# Altium PCB LK-RX.PCBDOC
Units mm, origin at the board's own origin, x right, y up, seen from the top; angles counter-clockwise.
Board outline 26.25 x 26.26 mm, 4 copper layers (Top Layer, MidLayer1, MidLayer2, Bottom Layer); 71 components, 48 nets, 217 pads, 65 vias.
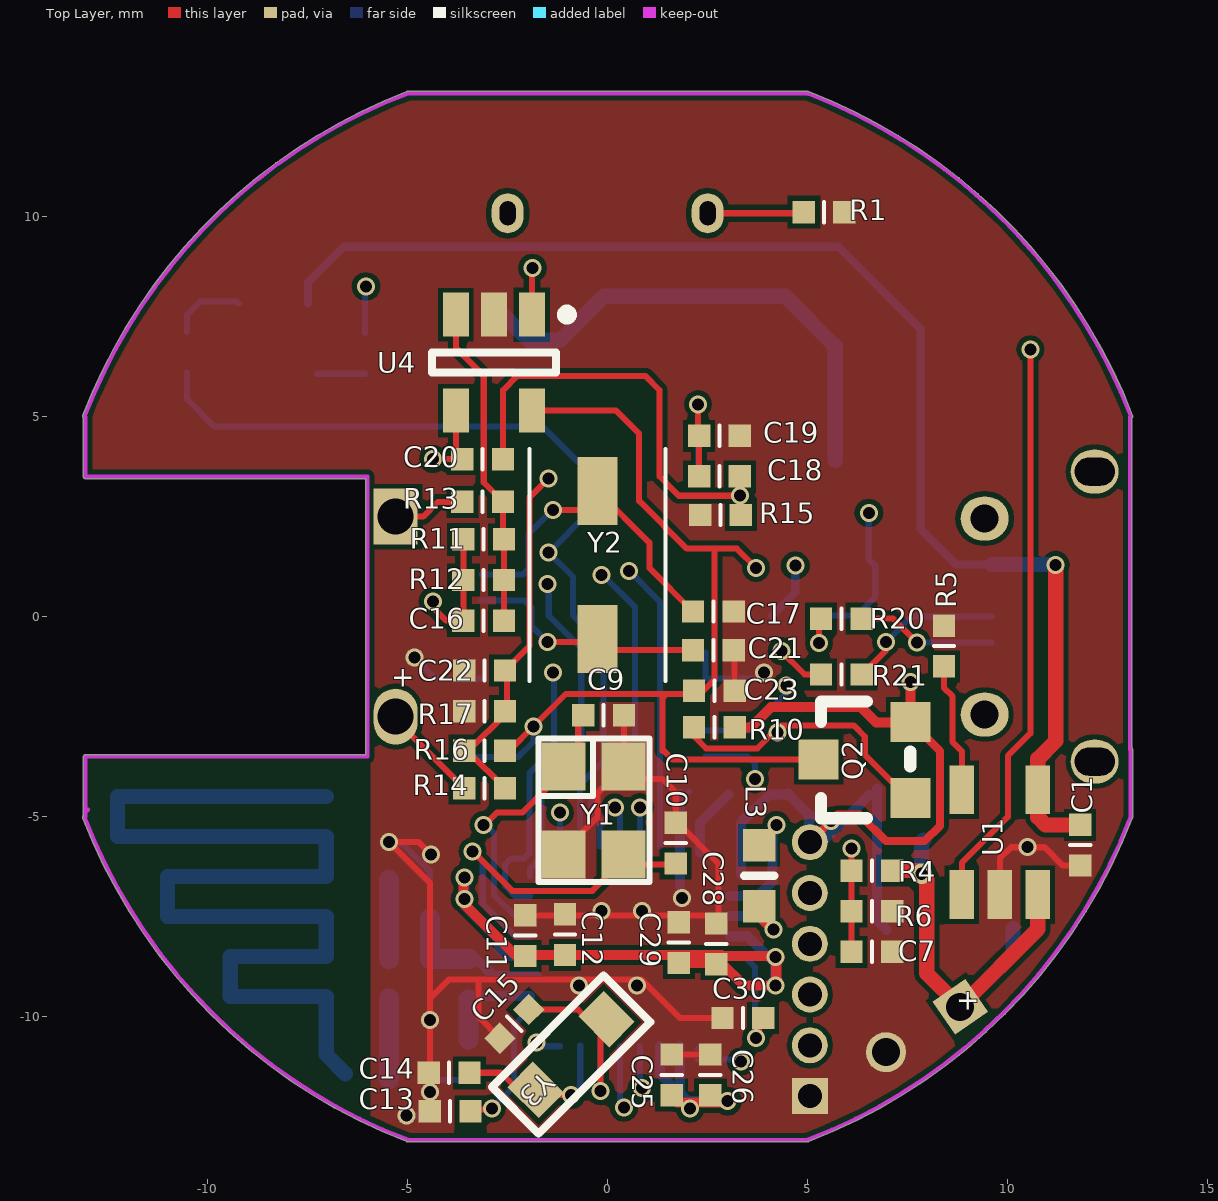
[diagram p0: Top Layer view]
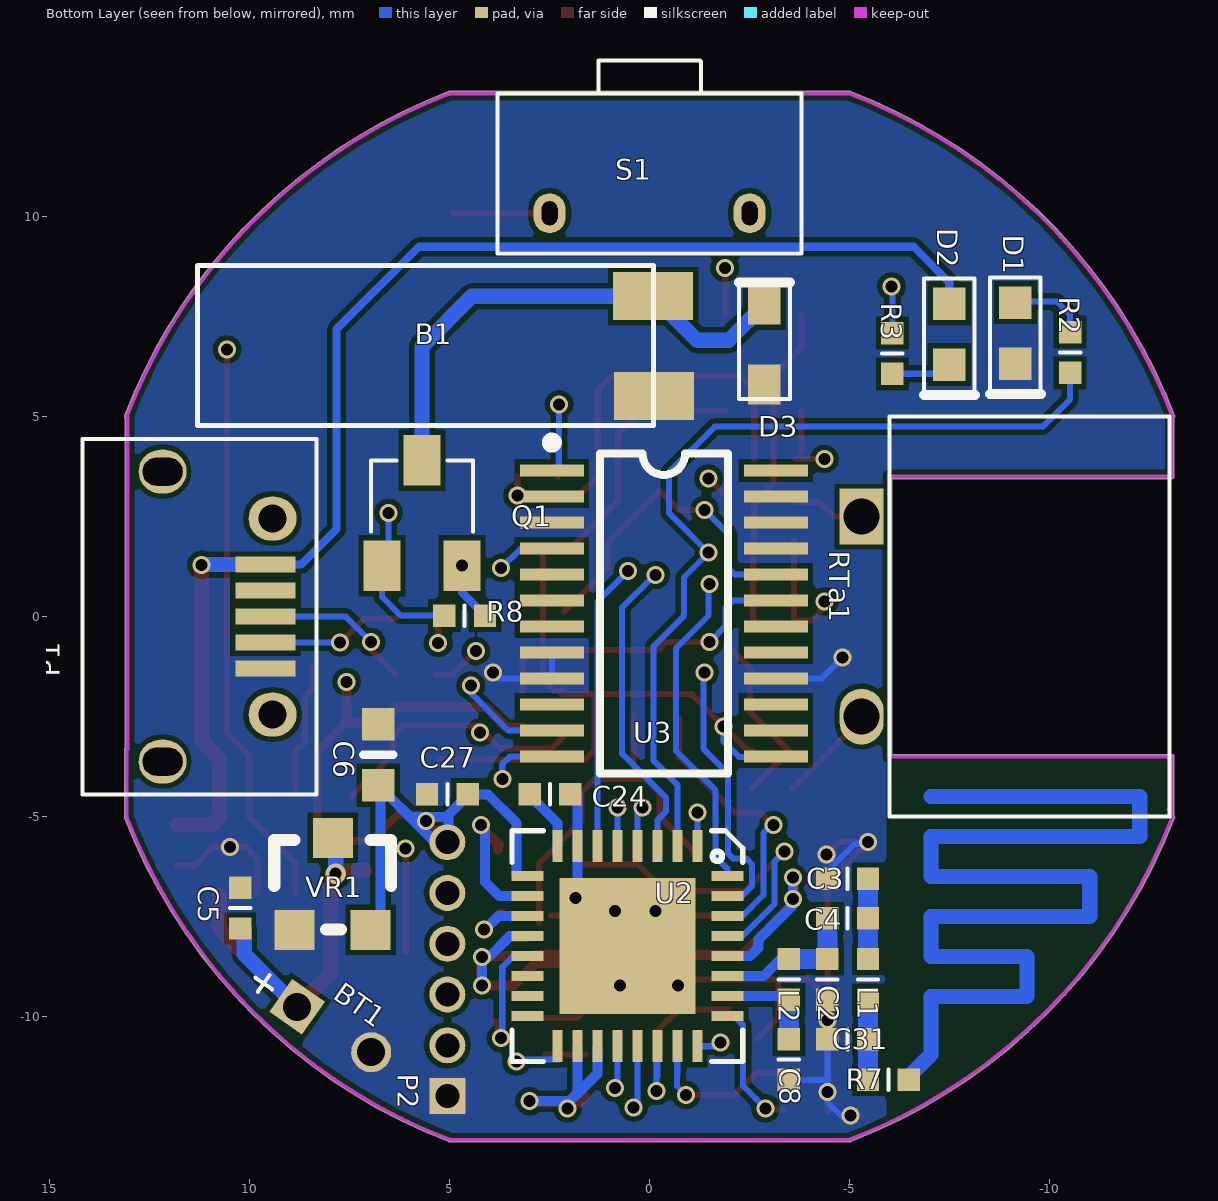
[diagram p1: Bottom Layer view, seen from below]
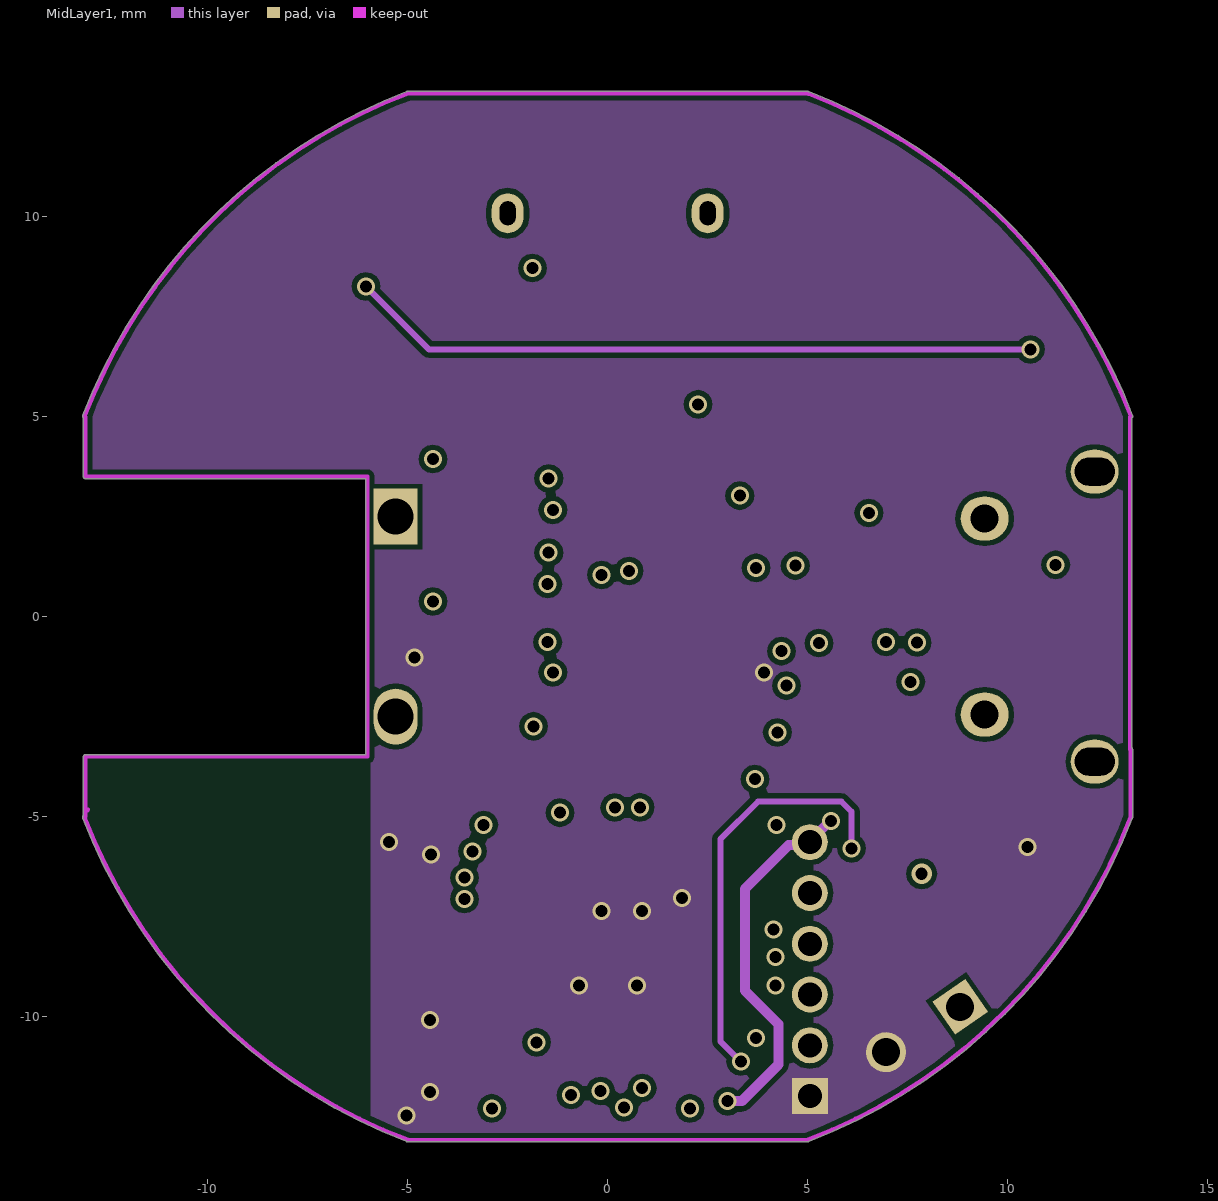
[diagram p2: MidLayer1]
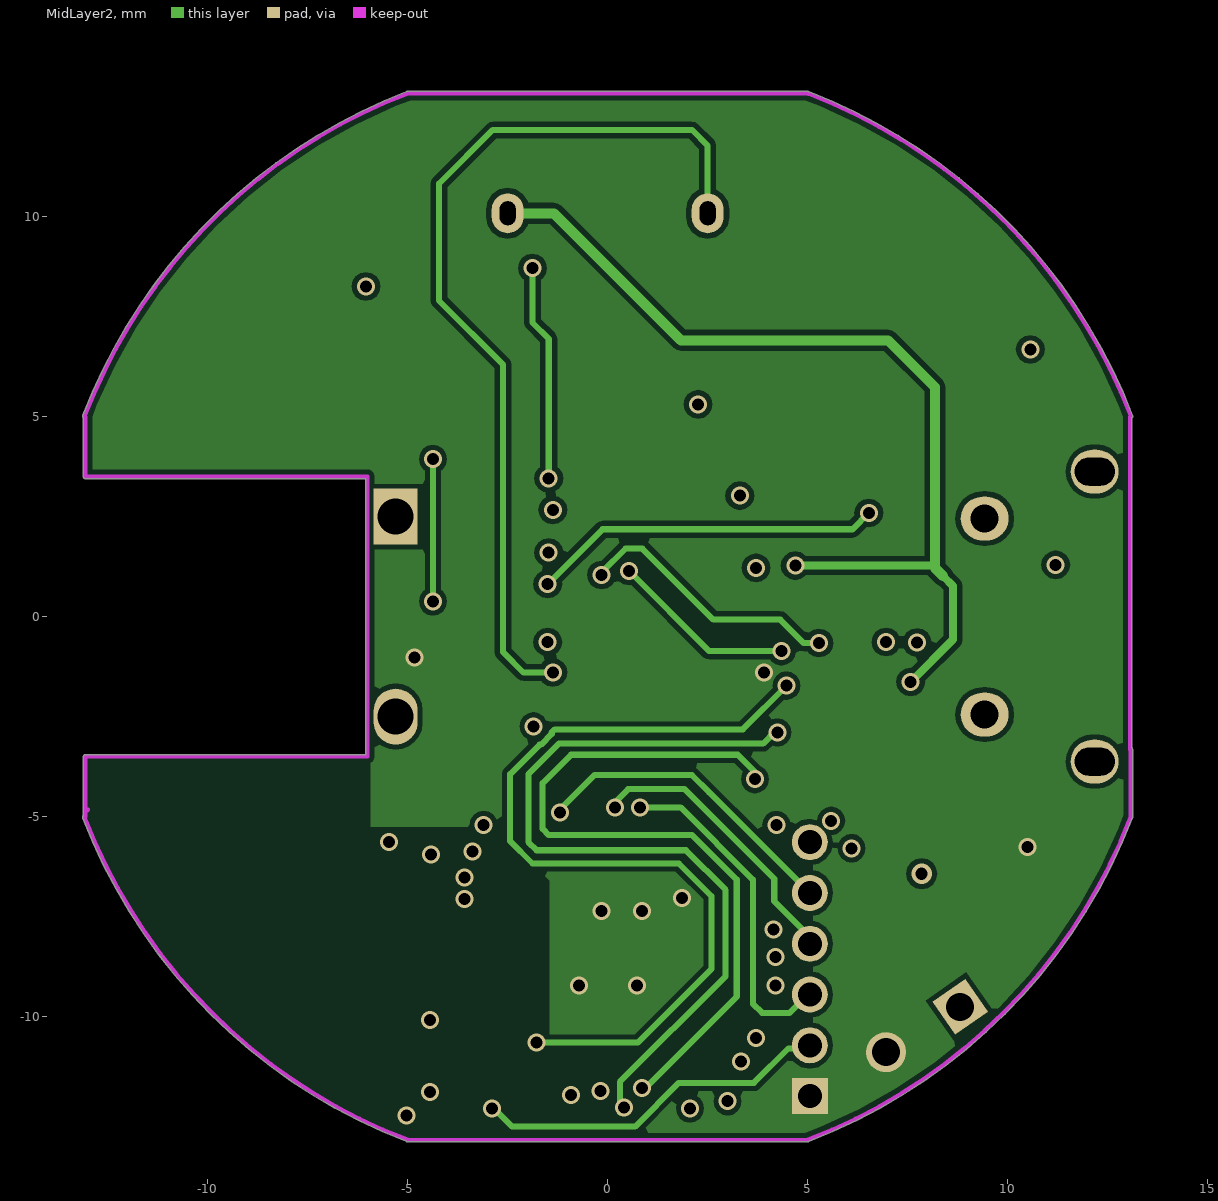
[diagram p3: MidLayer2]

## Layer stack, top to bottom
Top Solder: solder mask 0.0102, Solder Resist, Dk 3.5
Top Layer: signal copper 0.0356
Dielectric1: prepreg 0.32, FR-4, Dk 4.8
MidLayer1: signal copper 0.0356
Dielectric2: core 0.32, FR-4, Dk 4.8
MidLayer2: signal copper 0.0356
Dielectric3: prepreg 0.32, FR-4, Dk 4.8
Bottom Layer: signal copper 0.0356
Bottom Solder: solder mask 0.0102, Solder Resist, Dk 3.5

## Board outline
-13.118,-5.033 cw(c-13.071,-5.015) -13.119,-5.031 cw(c-13.073,-5.01) -13.108,-4.975 -13.106,-4.972 -13.106,-3.5 cw(c-13.056,-3.5) -13.056,-3.45 -6.05,-3.45 -6.05,3.45 -13.056,3.45 cw(c-13.056,3.5) -13.106,3.5 -13.106,4.968 cw(c-13.074,5.007) -13.121,5.025 cw(c0,0) -5.035,13.117 cw(c-5,13.081) -5,13.131 5,13.131 cw(c5,13.081) 5.035,13.117 cw(c0,0) 13.121,5.025 cw(c13.074,5.007) 13.124,5.007 cw(c13.074,5.007) 13.106,4.968 13.106,-3.281 cw(c13.071,-3.317) 13.121,-3.317 13.121,-5.015 cw(c13.071,-5.015) 13.118,-5.033 cw(c0,0) 5.033,-13.118 cw(c5,-13.08) 5,-13.13 -5,-13.13 cw(c-5,-13.08) -5.033,-13.118 cw(c0,0)

## Design rules (kind name [scope] priority, off if disabled: settings)
Clearance Clearance_1 [InNetClass('RF')] p1: gap=0.381
Clearance [All] p2: gap=0.127
ComponentClearance [All] p1: gap=0.127 collisioncheckmode=3 verticalgap=0.127 showdistances=FALSE
FabricationTestpoint [(IsPad And (OnTopLayer Or OnBottomLayer))] p1: side=3 testpointundercomponent=TRUE minsize=1.016 maxsize=2.54 preferedsize=1.524 minholesize=0 maxholesize=1.016 preferedholesize=0.813 testpointgrid=0.025 allowsidetop=TRUE allowsidebottom=TRUE usegrid=TRUE gridtolerance=0
PolygonConnect [All] p1: connectstyle=Direct reliefconductorwidth=0.254 reliefentries=4 polygonreliefangle="90 Angle" airgapwidth=0.254
RoutingCorners [All] p1: cornerstyle=Round minsetback=2.54 maxsetback=2.54
RoutingVias [All] p1: holewidth=0.305 width=0.508 viastyle="Through Hole" minholewidth=0.3 minwidth=0.45 maxholewidth=0.711 maxwidth=1.27
SolderMaskExpansion [All] p1: expansion=0.102
Width [All] p1: maxlimit=1 minlimit=0.152 preferedwidth=0.5
27 further rules are at their usual default settings.

## Components (designator, comment, footprint, x,y, rotation, side; value= is the part's Value field where it differs from the comment)
B1 "Motor" "MOTO-40*44*114 - 3D" -0.102,6.782 r90 bottom
BT1 "Battery" BT 8.814,-9.754 r215 bottom
C1 "1uF" 0402 11.811,-6.223 r90 top
C2 "1.2pF/10V" 0402 -4.445,-8.56 r270 bottom
C3 "1.8pF/10V" 0402 -4.445,-6.553 r180 bottom
C4 "220pF/10V" 0402 -5.461,-7.544 r0 bottom
C5 "1uF" 0402 10.236,-7.798 r90 bottom
C6 "22uF" 0603 6.782,-4.216 r90 bottom
C7 "100nF" 0402 7.112,-8.382 r180 top
C8 "18pF/10V" 0402 -3.48,-11.582 r90 bottom
C9 "12pF" 0402 -0.61,-2.464 r0 top
C10 "12pF" 0402 1.702,-6.172 r90 top
C11 "0.1uF/10V" 0402 -2.057,-7.468 r270 top
C12 "2.2uF/10V" 0402 -1.067,-7.442 r270 top
C13 "1uF/10V" 0402 -4.445,-12.37 r0 top
C14 "6pF" 0402 -4.47,-11.405 r0 top
C15 "6pF" 0402 -2.692,-10.541 r45 top
C16 "100pF" 0402 -3.607,-0.102 r0 top
C17 "15pF" 0402 2.134,0.127 r0 top
C18 "1nF" 0402 3.302,3.505 r180 top
C19 "10nF" 0402 2.286,4.521 r0 top
C20 "10nF" 0402 -3.632,3.937 r0 top
C21 "15pF" 0402 2.134,-0.838 r0 top
C22 "100pF" 0402 -3.581,-1.346 r0 top
C23 "0.1uF" 0402 3.175,-1.854 r180 top
C24 "1uF/10V" 0402 1.981,-4.445 r0 bottom
C25 "0.1uF/10V" 0402 1.6,-10.947 r270 top
C26 "1uF/10V" 0402 2.565,-10.947 r270 top
C27 "1uF/10V" 0402 5.563,-4.445 r180 bottom
C28 "1uF/10V" 0402 2.718,-7.671 r270 top
C29 "0.1uF/10V" 0402 1.778,-7.645 r270 top
C30 "1uF/10V" 0402 2.87,-10.033 r0 top
C31 "1.8pF/10V" 0402 -4.445,-10.566 r180 bottom
D1 "LEDG" LED0603#1 -9.144,7.087 r270 bottom
D2 "LEDR" LED0603#1 -7.493,7.061 r270 bottom
D3 "IN4148" LED0603#2 -2.87,6.833 r90 bottom
L1 "1.8nH" 0402 -5.461,-9.576 r90 bottom
L2 "1.3nH" 0402 -3.48,-9.576 r90 bottom
L3 "47uH" 0603 3.785,-5.715 r270 top
P1 "microUSB" MICROUSB 9.6,0 r90 bottom
P2 "Header 6" SIP6-1.27 5.055,-11.989 r90 bottom
Q1 "AO3401A" AO3401 5.69,2.591 r180 bottom
Q2 "AO3401A" SOT23 6.426,-3.581 r90 top
R1 "10K" 0402 5.918,10.109 r180 top
R2 "1K" 0402 -10.516,6.096 r90 bottom
R3 "1K" 0402 -6.071,7.087 r270 bottom
R4 "2M" 0402 6.096,-6.35 r0 top
R5 "2K" 0402 8.407,-0.229 r270 top
R6 "200K" 0402 7.112,-7.366 r180 top
R7 "0" 0402 -6.477,-11.582 r0 bottom
R8 "10K" 0402 5.131,0.025 r180 bottom
R10 "10K" 0402 2.159,-2.769 r0 top
R11 "43K" 0402 -2.591,1.93 r180 top
R12 "43K" 0402 -2.591,0.914 r180 top
R13 "43K" 0402 -3.632,2.87 r0 top
R14 "43K" 0402 -3.581,-4.293 r0 top
R15 "2.7MR" 0402 2.311,2.54 r0 top
R16 "43K" 0402 -3.581,-3.353 r0 top
R17 "43K" 0402 -3.581,-2.362 r0 top
R20 "0R" 0402 5.334,-0.051 r0 top
R21 "0R" 0402 5.334,-1.448 r0 top
RTa1 "RX-40K" US-10MM -5,0 r180 bottom
S1 "开关" SW3x6x5 0,10.084 r0 bottom
U1 "TP4054" TP4054 9.804,-5.639 r0 top
U2 "TLSR8258F512ET32" QFN-32 -1.194,-5.74 r270 bottom
U3 "CS102" TSSOP24 -0.356,0.076 r90 bottom
U4 "LMV321" MF05A_N -2.845,6.35 r90 top
VR1 "MCP33" SOT23 7.925,-6.68 r180 bottom
Y1 "24M" XTAL4TN_3225 -0.356,-4.851 r270 top
Y2 "8M" 5032 -0.254,1.295 r270 top
Y3 "32.768K" S3215 -0.914,-10.947 r225 top

## Footprints (in the part's own frame and the unit in brackets; to place one, negate y for a bottom-side part, rotate by r counter-clockwise, add the part's x,y. Pads: shape width x height; smd on the part's side, far side on the other; paste and mask are expansions set on the pad)
0402 [mil]
  rect 22x22 smd: 1(0,0) 2(40,0)
  silkscreen extent 20,-10 20,10
0603 [mil]
  rect 32x32 smd: 1(0,0) 2(60,0)
  silkscreen extent 30,-15 30,15
5032 [mm]
  rect 1.7x1 smd: 1(-1.85,0) 2(1.85,0)
  silkscreen extent -2.9,-1.7 2.9,1.7
AO3401 [mm]
  rect 0.915x1.27 smd: 1(-1,-1.318) 2(1,-1.318) 3(0,1.318)
  silkscreen extent -1.27,-0.46 1.27,1.32
BT [mm]
  rect 1x1 hole 0.7: 1(0,0)
  round 1 hole 0.7: 2(2.172,0.133)
  silkscreen extent -1.27,-0.25 -0.76,0.25
LED0603#1 [mil]
  rect 32x32 smd: 1(-30,0) 2(30,0)
  silkscreen extent -55,-25 60,25
LED0603#2 [mil]
  rect 39.37x32 smd: 1(-40.65,0) 2(38.09,0)
  silkscreen extent -55,-25 60,25
MF05A_N [mm] "SOT23, 5-Leads, Body 2.9x1.6mm, Pitch 0.95mm, Lead Span 2.8mm, IPC Medium Density"
  rect 1.1x0.65 smd: 1(1.2,-0.95) 2(1.2,0) 3(1.2,0.95) 4(-1.2,0.95) 5(-1.2,-0.95)
  silkscreen extent -0.25,-1.95 1.32,1.55, body extent -0.9,-1.55 0.9,1.55, height 1.22
MICROUSB [mm]
  rect 0.4x1.5 smd: 1(-1.3,0) 2(-0.65,0) 3(0,0) 4(0.65,0) 5(1.3,0)
  oval 1.1x1.2 hole 0.7 slot 1 at 90 deg: ""(-3.625,2.575) ""(3.625,2.575)
  oval 1.1x1.2 hole 0.7: ""(-2.45,-0.175) ""(2.45,-0.175)
  silkscreen extent -4.44,-1.27 4.44,4.57
"MOTO-40*44*114 - 3D" [mm]
  rect 1.2x2 smd: 1(-1.263,-0.009) 2(1.228,0.012)
  silkscreen extent -2,0 2,11.4, body extent -2,0 1.99,10.55, height 3.4
QFN-32 [mm] "4*4/QFN40P"
  rect 0.8x0.25 smd: 1(0,0) 2(0,-0.5) 3(0,-1) 4(0,-1.5) 5(0,-2) 6(0,-2.5) 7(0,-3) 8(0,-3.5) 17(5,-3.5) 18(5,-3) 19(5,-2.5) 20(5,-2) 21(5,-1.5) 22(5,-1) 23(5,-0.5) 24(5,0)
  rect 0.25x0.8 smd: 9(0.75,-4.25) 10(1.25,-4.25) 11(1.75,-4.25) 12(2.25,-4.25) 13(2.75,-4.25) 14(3.25,-4.25) 15(3.75,-4.25) 16(4.25,-4.25) 25(4.25,0.75) 26(3.75,0.75) 27(3.25,0.75) 28(2.75,0.75) 29(2.25,0.75) 30(1.75,0.75) 31(1.25,0.75) 32(0.75,0.75)
  rect 3.4x3.4 smd: 33(2.5,-1.75)
  silkscreen extent -0.39,-4.64 5.39,1.14
S3215 [mm] "TFX-02S"
  rect 0.9x1.1 smd: 1(-1.25,0) 2(1.25,0)
  Top Layer pour cut-out: 0.575,0.65 0.575,-0.65 -0.575,-0.65 -0.575,0.65
  silkscreen extent -1.98,-0.82 1.98,0.82
SIP6-1.27 [mm]
  rect 0.9x0.9 hole 0.6: 1(0,0)
  round 0.9 hole 0.6: 2(1.27,0) 3(2.54,0) 4(3.81,0) 5(5.08,0) 6(6.35,0)
SOT23 [mm]
  rect 1x1 smd: 1(-0.953,-1.15) 2(0.953,-1.15) 3(0.005,1.15)
  silkscreen extent -1.46,-1.14 1.46,1.09
SW3x6x5 [mm]
  oval 0.8x1 hole 0.4 slot 0.6 at 90 deg: 1(-2.5,0) 2(2.5,0)
  silkscreen extent -3.8,-3.81 3.8,1
TP4054 [mm]
  rect 0.62x1.22 smd: 1(-0.95,-1.31) 2(0,-1.31) 3(0.95,-1.31) 4(0.95,1.31) 5(-0.95,1.31)
TSSOP24 [mm] "Shrink Small Outline; 24 Leads; Body Width 4.4 mm; Pitch 0.65 mm"
  rect 0.3x1.6 smd: 1(3.575,2.8) 2(2.925,2.8) 3(2.275,2.8) 4(1.625,2.8) 5(0.975,2.8) 6(0.325,2.8) 7(-0.325,2.8) 8(-0.975,2.8) 9(-1.625,2.8) 10(-2.275,2.8) 11(-2.925,2.8) 12(-3.575,2.8) 13(-3.575,-2.8) 14(-2.925,-2.8) 15(-2.275,-2.8) 16(-1.625,-2.8) 17(-0.975,-2.8) 18(-0.325,-2.8) 19(0.325,-2.8) 20(0.975,-2.8) 21(1.625,-2.8) 22(2.275,-2.8) 23(2.925,-2.8) 24(3.575,-2.8)
  silkscreen extent -4,-1.6 4.4,2.93
US-10MM [mm]
  oval 1.1x1.4 hole 0.9: +(0.3,-2.5)
  rect 1.1x1.4 hole 0.9: -(0.3,2.5)
  silkscreen extent 1,-5 8,5
XTAL4TN_3225 [mm]
  rect 1.2x1.1 smd: 1(-1.1,-0.75) 2(1.1,0.75) 3(1.1,-0.75) 4(-1.1,0.75)
  silkscreen extent -1.8,-1.38 1.79,1.4

## Part data
B1: "Motor, General Kind"
BT1: "Multicell Battery"
C1 C2 C3 C4 C5 C6 C7 C8 C9 C10 C11 C12 C13 C14 C15 C16 C17 C18 C19 C20 C21 C22 C23 C24 C25 C26 C27 C28 C29 C30 C31: library part Cap, "Capacitor"
D1 D2: library part LED0, "Typical INFRARED GaAs LED"
D3: library part Diode, "Default Diode"
L1 L2 L3: library part Inductor, "Inductor"
P1: library part "Header 5", "Header, 5-Pin"
P2: "Header, 6-Pin"
Q1 Q2: library part "AO3401A P道沟 X13A15 SOT-23", "MOS(场效应管)"
R1 R2 R3 R4 R5 R6 R7 R8 R10 R20 R21: library part Res1, "Resistor"
R11 R12 R13 R14 R15 R16 R17: library part Res2, "Resistor"
RTa1: library part TC40K
S1: library part SW-SPST, "Single-Pole, Single-Throw Switch"
U3: library part CS100
U4: library part LMV321M5, "General Purpose, Low Voltage, Rail-to-Rail Output Operational Amplifiers"
VR1: library part "Volt Reg", "Voltage Regulator"
Y1 Y2 Y3: library part XTAL, "Crystal Oscillator"

## Via types
v1: diameter 0.45, hole 0.3, Top Layer to Bottom Layer, tented both sides, 64 vias
v2: diameter 0.508, hole 0.305, Top Layer to Bottom Layer, tented both sides, 1 vias

## Nets (pads, with @x,y where several pads share a name; then routed paths per layer and width w, separated by ;. In a path a pad name is that pad's centre, name@x,y a point inside that pad or via, vN(x,y) a via of type N, cw(c..) or ccw(c..) an arc to the next point about the centre after c; other vN are vias at no path point)
1.2V: C11.2 C12.2 C28.2 C29.2 U2.12 U2.28 | length 17.7
  Top Layer w0.254: v1@-3.607,-6.553 -3.607,-7.163 -2.311,-8.458 C12.2 C28.2@2.845,-8.458 ; C29.2 2.845,-8.661 3.404,-9.22 4.216,-9.22 4.216,-8.534 4.166,-8.484 C28.2@2.54,-8.484 ; v1@4.191,-8.433 v1@4.293,-8.534
  Bottom Layer w0.254: v1@-3.581,-6.579 -3.581,-7.214 -2.718,-8.077 -2.718,-8.28 -2.515,-8.484 U2.28@-1.93,-8.484 ; U2.12 3.495,-7.99 v1@4.013,-8.509 ; v1@4.191,-9.271 v1(4.191,-8.509)
  other v1: 4.191,-9.22 -3.581,-7.061 -3.581,-6.528
+3.3V: C6.1 C25.2 C26.2 C27.2 P2.6 Q1.2 Q2.2 R8.2 R10.2 S1.1 U2.9 U2.18 U2.19 VR1.2 | length 63.3
  Top Layer w0.203: P2.6 5.74,-4.953 6.299,-4.953 6.96,-5.613 7.925,-5.613 8.305,-5.233 8.305,-3.358 7.589,-2.642 Q2.2
  Top Layer w0.25: C25.2@1.6,-12.014 1.727,-12.141 2.972,-12.141 v1(2.997,-12.116) ; R10.2 3.581,-2.769 4.089,-2.261 6.325,-2.261 6.706,-2.642 7.589,-2.642 Q2.2@7.62,-2.642 ; Q2.2 v1(7.576,-1.633)
  MidLayer1 w0.25: v1(2.997,-12.116) 3.353,-12.116 4.267,-11.201 4.267,-10.185 3.429,-9.347 3.429,-6.807 4.521,-5.715 P2.6@5.055,-5.715 ; P2.6@5.218,-5.45 v1@5.595,-5.073
  MidLayer2 w0.203: v1(4.69,1.273) 8.125,1.273 ; v1(7.576,-1.633) 8.636,-0.573 8.636,0.762 8.388,1.01
  MidLayer2 w0.25: S1.1 -1.346,10.084 1.829,6.909 7.01,6.909 8.179,5.74 8.179,1.219 8.388,1.01
  Bottom Layer w0.203: R8.2 4.69,0.6 v1(4.69,1.273)
  Bottom Layer w0.25: U2.19 1.306,-11.43 1.806,-11.93 1.806,-11.915 ; 1.778,-11.887 1.806,-11.915 ; U2.18 1.806,-11.915 ; v1@2.007,-12.116 v1(2.997,-12.116) ; v1@2.032,-12.37 2.032,-12.141 1.806,-11.915 ; U2.9@3.327,-6.452 3.327,-5.156 4.039,-4.445 C27.2@4.521,-4.445 ; C27.2@4.496,-4.42 C27.2@4.521,-4.445 ; C27.2 C27.2@4.521,-4.445 ; P2.6@5.029,-5.588 5.029,-5.029 ; 5.029,-5.004 5.994,-5.004 ; 5.029,-4.953 C27.2@4.521,-4.445 ; P2.6@5.182,-5.613 5.385,-5.613 5.994,-5.004 ; C6.1@6.528,-4.445 6.528,-4.47 5.994,-5.004 ; C6.1@6.731,-4.293 6.731,-7.589 VR1.2
  other v1: 2.057,-12.294 5.588,-5.105
+5V: C1.2 D2.1 P1.5 U1.4 | length 33.6
  Top Layer w0.381: v1(11.201,1.295) 11.201,-3.109 10.754,-3.556 U1.4 10.754,-5.014 10.947,-5.207 C1.2 C1.2@11.633,-5.207
  Bottom Layer w0.203: D2.1 -7.493,8.357 -6.604,9.246 5.766,9.246 7.823,7.188 7.823,2.184 8.708,1.3 P1.5
  Bottom Layer w0.381: P1.5 v1@11.197,1.3
ADC0: C7.2 R4.1 R6.2 U2.17 | length 14.5
  Top Layer w0.152: C7.2 R6.2 v1(6.096,-5.791)
  MidLayer1 w0.152: v1(3.327,-11.125) 2.819,-10.617 2.819,-5.563 3.759,-4.623 5.842,-4.623 6.096,-4.877 v1(6.096,-5.791)
  Bottom Layer w0.152: U2.17@2.261,-10.795 2.261,-11.074 3.277,-11.074 v1(3.327,-11.125) ; U2.17@2.306,-10.795 U2.17
CS102-EN: Q2.1 R10.1 U2.21 | length 29.2
  Top Layer w0.152: R10.1 2.159,-2.992 2.464,-3.297 3.739,-3.297 4.318,-2.718 6.147,-2.718 6.426,-2.997 6.426,-3.454 Q2.1@7.468,-4.496
  MidLayer2 w0.152: v1@0.306,-12.397 0.306,-11.632 2.946,-8.992 2.946,-6.833 1.956,-5.842 -1.778,-5.842 -1.981,-5.639 -1.981,-3.937 -1.219,-3.175 3.886,-3.175 v1@4.191,-2.87
  Bottom Layer w0.152: v1@0.306,-12.397 0.306,-11.176 ; 0.306,-11.431 0.306,-11.176 ; U2.21 0.306,-11.176
  other v1: 0.406,-12.268 4.242,-2.896
CS102-T: U2.20 U3.12 | length 21.6
  MidLayer2 w0.152: v1@0.813,-11.913 3.226,-9.5 3.226,-6.576 2.111,-5.461 -1.473,-5.461 -1.626,-5.309 -1.626,-4.166 -0.914,-3.454 3.251,-3.454 v1@3.759,-3.962
  Bottom Layer w0.152: U2.20 0.806,-11.906 v1@0.813,-11.913 ; U3.12 3.499,-3.499 3.683,-3.683 v1(3.683,-4.064)
  other v1: 0.864,-11.786
ECHO: U2.24 U3.11 | length 25.1
  MidLayer2 w0.152: v1(-1.778,-10.643) 0.762,-10.643 2.591,-8.814 2.591,-6.985 1.778,-6.172 -1.88,-6.172 -2.438,-5.613 -2.438,-3.937 -1.702,-3.2 ; -1.665,-3.2 -1.397,-2.933 ; -1.397,-2.896 -1.321,-2.819 3.378,-2.819 v1(4.47,-1.727)
  Bottom Layer w0.152: v1@-1.731,-10.74 U2.24 ; U3.11 3.527,-2.849 4.47,-1.905 v1(4.47,-1.727)
GND: B1.1 BT1.2 C1.1 C2.2 C3.1 C5.2 C6.2 C7.1 C8.1 C9.2 C10.2 C11.1 C12.1 C13.1 C14.1 C15.1 C17.2 C19.2 C21.2 C22.1 C23.1 C24.1 C25.1 C26.1 C27.1 C28.1 C29.1 C30.1 C31.1 D1.2 D3.1 P1.1 P2.1 R1.1 R5.1 R6.1 R15.1 R17.1 U1.2 U2.7 U2.33 U3.3 U3.8 U3.9 U3.16 U3.21 U3.22 U3.23 U4.2 VR1.1 Y1.3 Y1.4 | length 49.2
  Top Layer w0.152: C13.1 v1(-4.445,-11.887) v1(-4.445,-10.084) -4.445,-9.55 ; v1(-4.42,-5.944) -4.724,-5.639 v1(-5.461,-5.639) -4.445,-6.655 -4.445,-9.55 ; C15.1 -3.226,-10.008 -3.226,-9.068 ; C11.1 C28.1@2.464,-7.468 ; Y1.3 -1.106,-5.855 -0.25,-5 -0.25,-4.416 0.102,-4.064 1.372,-4.064 1.702,-4.394 1.702,-5.105 2.769,-6.172 C28.1@2.769,-7.645 ; Y1.4 0.406,-3.739 C9.2 ; C25.1 C26.1 C26.1@2.616,-10.947 ; C30.1 1.803,-10.033 0.838,-9.068 -3.226,-9.068 ; C21.2 3.175,-0.864 C23.1 ; U1.2 9.804,-6.045 10.084,-5.766 10.922,-5.766 11.379,-6.223 C1.1 ; -4.445,-9.55 -3.962,-9.068 -3.226,-9.068
  Bottom Layer w0.152: v1(-5.461,-5.639) -5.41,-5.69 -5.119,-5.69 -4.445,-6.364 C3.1 ; v1@-4.978,-12.497 -4.801,-12.497 -4.445,-12.141 C2.2 ; v1(-4.826,-1.016) -4.293,-1.549 U3.16 ; -4.369,-11.582 C8.1 ; U2.7 U2.7@1.829,-5.718 ; C24.1@1.829,-4.572 C24.1@2.032,-4.369 ; U3.8 U3.9 3.76,-1.549 v1(3.912,-1.397)
  Bottom Layer w0.25: U2.33@1.803,-6.731 C24.1@1.803,-4.42
  other v1: -5.029,-12.471 -0.711,-9.22 0.737,-9.22 -0.152,-7.366 0.864,-7.366 1.854,-7.036 10.49,-5.766
LED: R2.1 U2.2 | length 22.9
  Bottom Layer w0.152: R2.1 -10.516,5.436 -9.83,4.75 -1.626,4.75 -0.483,3.607 -0.483,2.591 v1(-1.473,1.6) -0.864,0.991 -0.864,0.025 -0.102,-0.737 -0.102,-1.88 ; U2.2 -0.694,-4.199 -0.102,-3.607 -0.102,-1.88 ; -0.102,-1.041 -0.102,-1.88
M-EN: Q1.1 R8.1 U2.32 | length 23
  MidLayer2 w0.152: v1(-1.499,0.813) -0.127,2.184 4.039,2.184 ; 4.369,2.184 4.039,2.184 ; v1(6.528,2.591) 6.121,2.184 4.039,2.184
  Bottom Layer w0.152: U2.32 -1.944,-6.301 -1.651,-6.009 -1.651,-4.343 -0.66,-3.353 -0.66,-2.921 ; v1@-1.473,0.838 -1.473,0.025 -0.66,-0.787 -0.66,-2.921 ; -0.66,-1.118 -0.66,-2.921 ; R8.1 6.223,0.025 6.69,0.492 Q1.1 6.528,1.435 v1(6.528,2.591)
NetB1_2: B1.2 D3.2 Q1.3 | length 12.8
  Bottom Layer w0.381: D3.2 -1.979,6.909 -1.191,6.909 B1.2 4.436,8.01 5.69,6.756 Q1.3
NetC2_1: C2.1 C4.2 L2.2 U2.27 | length 3.9
  Bottom Layer w0.25: L2.2@-3.505,-8.585 -3.251,-8.585 -2.846,-8.99 U2.27@-1.766,-8.99
  Bottom Layer w0.5: C4.2 C2.1 L2.2@-3.454,-8.56
NetC3_2: C3.2 C4.1 L1.2 | length 2
  Bottom Layer w0.5: L1.2 C3.2@-5.461,-6.579
NetC8_2: C8.2 L2.1 U2.26 | length 2.5
  Bottom Layer w0.25: L2.1@-3.489,-9.49 U2.26
  Bottom Layer w0.5: C8.2 L2.1
NetC9_1: C9.1 U2.30 Y1.1 | length 7.1
  Top Layer w0.152: v1@-3.073,-5.207 -2.769,-4.902 -2.134,-4.902 -0.737,-3.505 C9.1@-0.737,-2.54
  Bottom Layer w0.152: v1@-3.175,-5.08 -2.845,-5.41 -2.845,-6.96 -2.314,-7.49 U2.30
  other v1: -3.099,-5.207
NetC10_1: C10.1 U2.29 Y1.2 | length 8.7
  Top Layer w0.152: v1(-3.378,-5.867) -2.388,-6.858 -0.381,-6.858 0.279,-6.198 C10.1@1.676,-6.198
  Bottom Layer w0.152: v1(-3.378,-5.867) -3.124,-6.121 -3.124,-7.178 -2.312,-7.99 U2.29
NetC14_2: C14.2 U2.23 Y3.2 | length 4.8
  Top Layer w0.152: C14.2 -2.667,-11.405 -2.108,-11.963 v1(-0.914,-11.963)
  Bottom Layer w0.152: v1(-0.914,-11.963) -0.686,-11.735 U2.23@-0.686,-10.719 ; -0.694,-11.463 U2.23
NetC15_2: C15.2 U2.22 Y3.1 | length 5.6
  Top Layer w0.152: C15.2 -0.744,-9.823 Y3.1@-0.483,-10.084 ; Y3.1@-0.47,-10.071 -0.178,-10.363 v1(-0.178,-11.862)
  Bottom Layer w0.152: -0.194,-11.49 U2.22 ; v1(-0.178,-11.862) U2.22@-0.178,-10.566
NetC16_1: C16.1 C20.1 R11.2 R12.2 U4.4 | length 8.5
  Top Layer w0.152: v1(-4.369,0.381) -4.369,0.229 -4.039,-0.102 C16.1 ; v1(-4.369,3.937) C20.1 ; C20.1@-3.795,4.1 U4.4 ; C16.1@-3.607,-0.178 C16.1 ; R11.2 R12.2 C16.1
  MidLayer2 w0.152: v1(-4.369,0.381) v1(-4.369,3.937)
NetC16_2: C16.2 R11.1 R12.1 R13.2 U4.3 | length 8.1
  Top Layer w0.152: U4.3 -3.795,6.716 -3.099,6.02 -3.099,3.353 R13.2 -2.616,2.007 R11.1@-2.642,1.981 ; C16.2 R12.1 R11.1
NetC17_1: C17.1 U3.20 Y2.1 | length 8.3
  Top Layer w0.152: v1(-1.372,2.667) -0.732,2.667 Y2.1 1.041,1.85 1.041,1.219 C17.1
  Bottom Layer w0.152: U3.20 -2.124,1.051 -1.981,1.194 -1.981,2.057 v1(-1.372,2.667)
NetC21_1: C21.1 U3.19 Y2.2 | length 6
  Top Layer w0.152: v1(-1.499,-0.635) Y2.2@-0.406,-0.635 ; Y2.2@-0.356,-0.686 -0.203,-0.838 C21.1
  Bottom Layer w0.152: U3.19 -2.078,0.401 -1.905,0.229 -1.905,-0.229 v1(-1.499,-0.635)
NetC22_2: C22.2 R14.2 R16.1 R17.2 U4.1 | length 15.7
  Top Layer w0.152: R14.2 -3.48,-3.378 -3.48,-3.353 -2.515,-2.388 C22.2@-2.515,-1.295 ; C22.2 C22.2@-2.515,-1.295 ; C22.2@-2.489,-1.27 C22.2@-2.515,-1.295 ; U4.1 -1.895,8.697 v1(-1.88,8.712) ; v1(-1.473,3.454) -1.956,2.972 -1.956,-0.737 C22.2@-2.515,-1.295
  MidLayer2 w0.152: v1(-1.88,8.712) -1.88,7.352 -1.473,6.945 v1(-1.473,3.454)
NetC24_2: C24.2 U2.8 | length 1.7
  Bottom Layer w0.25: U2.8 2.306,-5.161 C24.2@3.023,-4.445 ; U2.8@2.311,-5.893 U2.8@2.311,-5.74
NetC30_2: C30.2 U2.13 | length 3
  Top Layer w0.152: v1@3.785,-10.643 C30.2@3.785,-10.135 ; C30.2@3.861,-10.16 C30.2@3.912,-10.109
  Bottom Layer w0.152: U2.13 3.41,-8.49 3.683,-8.763 v1@3.683,-10.49
  other v1: 3.708,-10.541
NetC31_2: C31.2 L1.1 R7.2 | length 2
  Bottom Layer w0.5: R7.2@-5.461,-11.557 C31.2 L1.1 L1.1@-5.461,-9.55
NetD1_1: D1.1 R2.2 | length 1.9
  Bottom Layer w0.152: R2.2 -10.516,7.544 -10.185,7.874 -9.271,7.874 D1.1@-9.22,7.823
NetD2_2: D2.2 R3.2 | length 1.2
  Bottom Layer w0.152: D2.2@-7.264,6.071 R3.2
NetE1_1: R7.1 | length 30.3
  Bottom Layer w0.381: -7.036,-4.497 -12.252,-4.497 -12.252,-5.498 -7.036,-5.498 -7.036,-6.498 -11.007,-6.498 -11.007,-7.499 -7.036,-7.499 -7.036,-8.499 -9.433,-8.499 -9.433,-9.5 -7.036,-9.5 -7.036,-10.947 R7.1@-6.553,-11.43
NetL3_1: L3.1 U2.10 | length 3.6
  Top Layer w0.25: L3.1@3.759,-5.715 v1@4.293,-5.182 ; L3.1@3.785,-5.817 L3.1@3.785,-5.664
  Bottom Layer w0.25: U2.10 3.754,-6.99 4.115,-6.629 4.115,-5.334 v1@4.267,-5.182
  other v1: 4.216,-5.207
NetL3_2: L3.2 U2.11 | length 1.8
  Top Layer w0.25: L3.2@3.708,-7.417 v1@4.14,-7.849
  Bottom Layer w0.25: U2.11 3.782,-7.49 v1@4.14,-7.849
  other v1: 4.14,-7.823
NetP1_2: P1.2 R20.2 | length 3.5
  Top Layer w0.152: R20.2 7.137,-0.051 v1(7.737,-0.65)
  Bottom Layer w0.152: v1(7.737,-0.65) P1.2
NetP1_3: P1.3 R21.2 | length 4
  Top Layer w0.152: R21.2 6.96,-0.838 v1(6.96,-0.635)
  Bottom Layer w0.152: v1(6.96,-0.635) 7.595,0 P1.3
NetR3_1: R3.1 U1.1 | length 32.7
  Top Layer w0.152: U1.1 8.854,-6.157 10.008,-5.004 10.008,-3.48 10.566,-2.921 v1(10.566,6.68)
  MidLayer1 w0.152: v1(-6.045,8.255) -4.47,6.68 v1(10.566,6.68)
  Bottom Layer w0.152: R3.1 v1@-6.071,8.23
NetR5_2: R5.2 U1.5 | length 3.3
  Top Layer w0.152: R5.2 8.407,-1.778 8.622,-1.992 8.622,-3.135 8.854,-3.368 U1.5
NetR13_1: R13.1 RTa1.- | length 1.8
  Top Layer w0.152: RTa1.- -4.612,2.5 -4.242,2.87 R13.1
NetR14_1: R14.1 RTa1.+ | length 2.3
  Top Layer w0.152: RTa1.+@-5.182,-2.692 R14.1
RESET: C13.2 P2.2 U2.25 | length 12.2
  Top Layer w0.152: C13.2@-3.353,-12.319 -2.921,-12.319 v1(-2.896,-12.294)
  MidLayer2 w0.152: v1@-2.87,-12.268 -2.388,-12.751 0.686,-12.751 1.778,-11.659 3.658,-11.659 4.521,-10.795 P2.2@5.004,-10.795
  Bottom Layer w0.152: v1(-2.896,-12.294) -2.337,-11.735 -2.337,-10.211 -2.116,-9.99 U2.25
RN: C18.2 C19.1 U3.1 | length 3.3
  Top Layer w0.152: C19.1@2.261,4.547 v1(2.261,5.309) ; C18.2 C19.1
  Bottom Layer w0.152: 2.261,3.835 v1(2.261,5.309)
RP: C18.1 C20.2 R15.2 U3.2 | length 11.2
  Top Layer w0.152: C20.2 -2.616,5.664 -2.261,6.02 0.94,6.02 1.295,5.664 1.295,3.505 1.778,3.023 v1(3.302,3.023) ; R15.2@3.302,2.565 v1(3.302,3.023) ; C18.1 v1(3.302,3.023)
RX: R20.1 U2.3 | length 15.2
  Top Layer w0.152: v1(5.283,-0.66) 5.283,-0.102 R20.1
  MidLayer2 w0.152: v1(-0.152,1.041) -0.152,1.104 0.446,1.702 0.864,1.702 2.642,-0.076 4.318,-0.076 4.902,-0.66 v1(5.283,-0.66)
  Bottom Layer w0.152: U2.3 -0.194,-5.089 -0.414,-4.869 -0.414,-4.529 0.686,-3.429 0.686,-0.991 ; v1@-0.051,0.965 0.686,0.229 0.686,-0.991 ; 0.686,-0.686 0.686,-0.991
SWM: P2.5 U2.1 | length 8.8
  MidLayer2 w0.152: v1(-1.194,-4.902) -1.194,-4.826 -0.33,-3.962 2.108,-3.962 2.54,-4.394 P2.5 ; P2.5@5.105,-6.934 P2.5@5.105,-6.909
  Bottom Layer w0.152: U2.1 v1(-1.194,-4.902)
SWS: P2.3 U2.5 | length 9.4
  MidLayer2 w0.152: v1(0.806,-4.769) 1.822,-4.769 3.632,-6.579 3.632,-9.677 3.861,-9.906 4.547,-9.906 P2.3@5.055,-9.398
  Bottom Layer w0.152: U2.5 v1(0.806,-4.769)
TP: P2.4 U2.4 | length 8.3
  MidLayer2 w0.152: v1@0.102,-4.724 0.515,-4.311 1.924,-4.311 4.166,-6.553 4.166,-7.112 5.182,-8.128 P2.4@5.182,-8.255 ; v1(0.178,-4.775) v1@0.178,-4.724
  Bottom Layer w0.152: U2.4 v1@0.306,-4.775
TX: R21.1 U2.6 | length 13
  Top Layer w0.152: v1(4.343,-0.864) 4.928,-1.448 R21.1
  MidLayer2 w0.152: v1(0.533,1.143) 2.54,-0.864 v1(4.343,-0.864)
  Bottom Layer w0.152: v1@0.584,1.092 1.306,0.37 U2.6
VBAT: BT1.1 C5.1 R4.2 U1.3 VR1.3 | length 11.5
  Top Layer w0.381: R4.2 7.772,-6.35 v2(7.849,-6.426) 7.976,-6.553 7.976,-8.915 BT1.1 10.754,-7.813 U1.3
  Bottom Layer w0.381: v2(7.849,-6.426) 7.849,-5.639 VR1.3@7.899,-5.588 ; BT1.1 10.135,-8.433 C5.1@10.135,-7.798
VCC-CS102: C23.2 Q2.3 R16.2 U3.4 U3.13 U4.5 | length 26.3
  Top Layer w0.152: R16.2 -2.464,-3.353 v1(-1.854,-2.743) -1.041,-1.93 1.473,-1.93 ; U4.5 0.209,5.15 0.787,4.572 0.787,2.896 1.981,1.702 3.226,1.702 v1(3.708,1.219) ; 1.372,-3.353 1.372,-2.032 1.473,-1.93 ; 1.397,-3.353 1.621,-3.576 Q2.3 ; C23.2@2.146,-1.867 C23.2 2.388,-1.854 2.667,-1.575 2.667,1.676 ; C23.2@2.21,-1.93 1.473,-1.93
  Bottom Layer w0.152: U3.13@-3.251,-3.505 -2.235,-3.505 -1.854,-3.124 v1(-1.854,-2.743) ; U3.4 3.226,1.701 v1(3.708,1.219)
WKUP: R1.2 S1.2 U2.31 | length 32.2
  Top Layer w0.152: S1.2 4.877,10.084 R1.2
  MidLayer2 w0.152: v1(-1.372,-1.397) -2.108,-1.397 -2.616,-0.889 -2.616,6.299 -4.216,7.899 -4.216,10.82 -2.87,12.167 2.108,12.167 2.5,11.775 S1.2
  Bottom Layer w0.152: U2.31 -2.306,-6.99 -2.565,-6.731 -2.565,-6.198 -2.413,-6.045 -2.083,-6.045 -1.956,-5.918 -1.956,-3.912 -1.346,-3.302 v1@-1.346,-1.372
pads on no net: P1. P1.4 U2.14 U2.15 U2.16 U3.5 U3.6 U3.7 U3.10 U3.14 U3.15 U3.17 U3.18 U3.24

## Polygon pours and split planes (outlines as drawn)
GND on Top Layer "MidLayer1-No Net" (solid, remove dead copper, pour order 1003): -13.208,15.85 -11.633,14.275 17.018,14.275 17.018,-5.918 9.423,-13.513 -5.918,-13.513 -5.918,-1.524 -10.033,2.591 -14.986,2.591 -14.986,14.072
GND on Bottom Layer "MidLayer1-No Net" (solid, remove dead copper, pour order 1002): -13.208,15.85 -11.633,14.275 17.018,14.275 17.018,-5.918 9.423,-13.513 -5.918,-13.513 -5.918,-1.524 -10.033,2.591 -14.986,2.591 -14.986,14.072
GND on MidLayer2 "MidLayer1-No Net" (solid, remove dead copper, pour order 1000): -13.208,15.85 -11.633,14.275 17.018,14.275 17.018,-5.918 16.637,-6.299 9.423,-13.513 7.137,-13.513 -0.33,-13.513 -0.533,-13.716 -0.787,-13.97 -0.787,-14.021 -1.27,-14.021 -1.321,-13.97 -1.448,-13.843 -1.448,-9.068 -1.448,-6.604 -2.05,-6.001 -2.794,-5.258 -5.918,-5.258 -5.918,-1.524 -8.611,1.168 -10.033,2.591 -14.986,2.591 -14.986,14.072 -13.208,15.85
GND on MidLayer1 "MidLayer1-No Net" (solid, remove dead copper, pour order 1001): -13.208,15.85 -11.633,14.275 17.018,14.275 17.018,-5.918 9.423,-13.513 -5.918,-13.513 -5.918,-1.524 -10.033,2.591 -14.986,2.591 -14.986,14.072

## Keep-outs
Keep-Out Layer:
  lines w0.1: -13.074,5.007 cw(c0,0) -4.99,13.081 ; -13.073,-5.01 -13.056,-4.993 -13.056,-3.5 -6,-3.5 -6,3.5 -13.056,3.5 -13.056,4.989 ; -13.071,-5.015 ccw(c0,0) -5.007,-13.074 ; -13.005,-4.841 -12.988,-4.824 ; -5,-13.08 5,-13.08 ; -5,13.081 5,13.081 ; 5.007,-13.074 ccw(c0,0) 13.071,-5.015 13.071,-3.317 ; 5.015,13.071 cw(c0,0) 13.074,5.007 ; 13.056,-3.317 13.056,3.302 13.056,4.989

## Other copper
Bottom Layer:
  pour cut-out: -1.397,-6.274 -1.397,-10.211 2.54,-10.211 2.54,-6.274
  pour cut-out: 1.321,-5.029 1.321,-6.248 2.159,-6.248 2.159,-5.029

## Silkscreen, mask and mechanical layers (free items; w line width, h text height)
Top Overlay:
  text "+" at -5.41,-1.753 h0.51
  text "+" at 8.712,-9.83 h0.51